# EAGLE board panel-ccu-pcu-out (EAGLE 9.3.0)
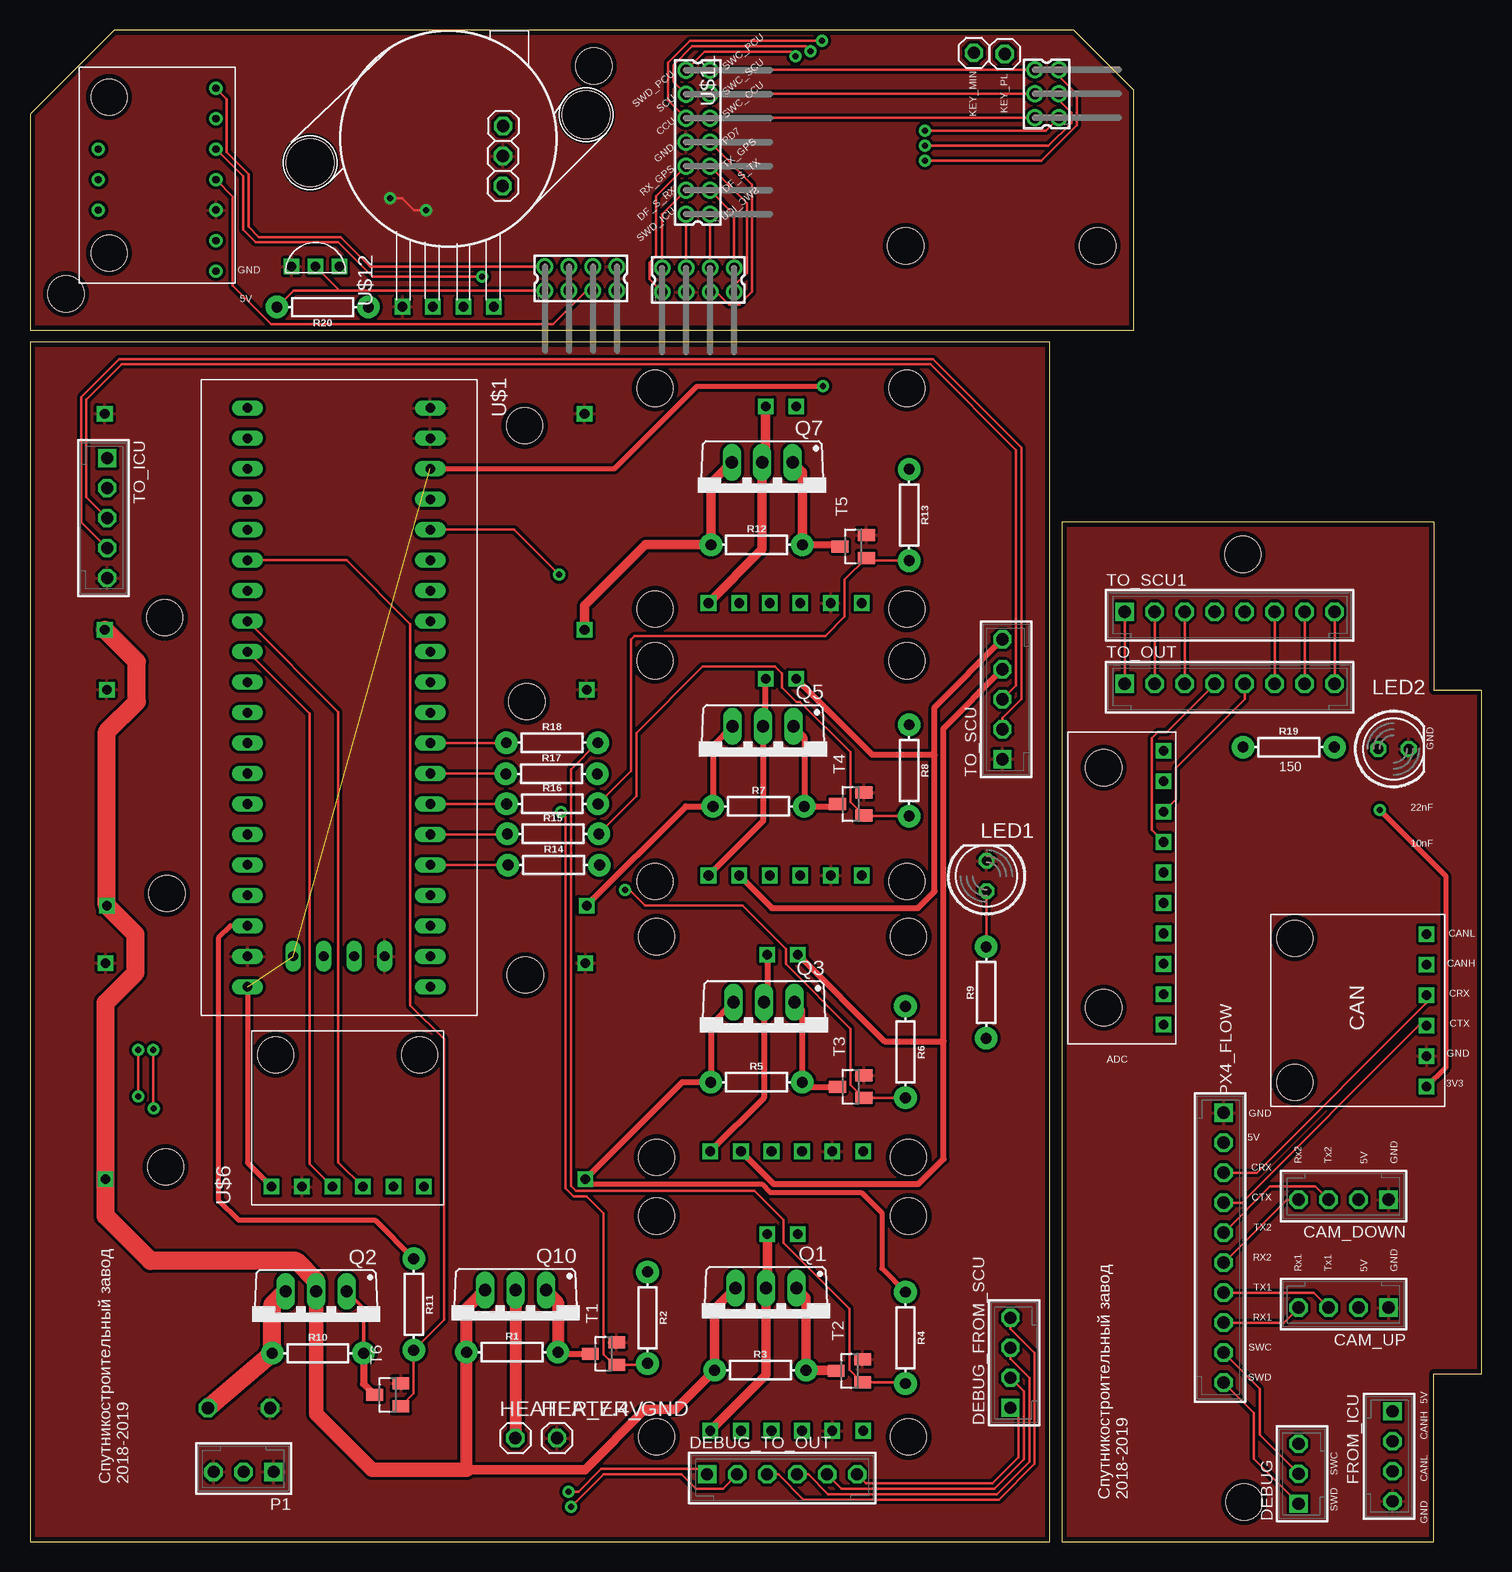
[diagram p0: board, top side]
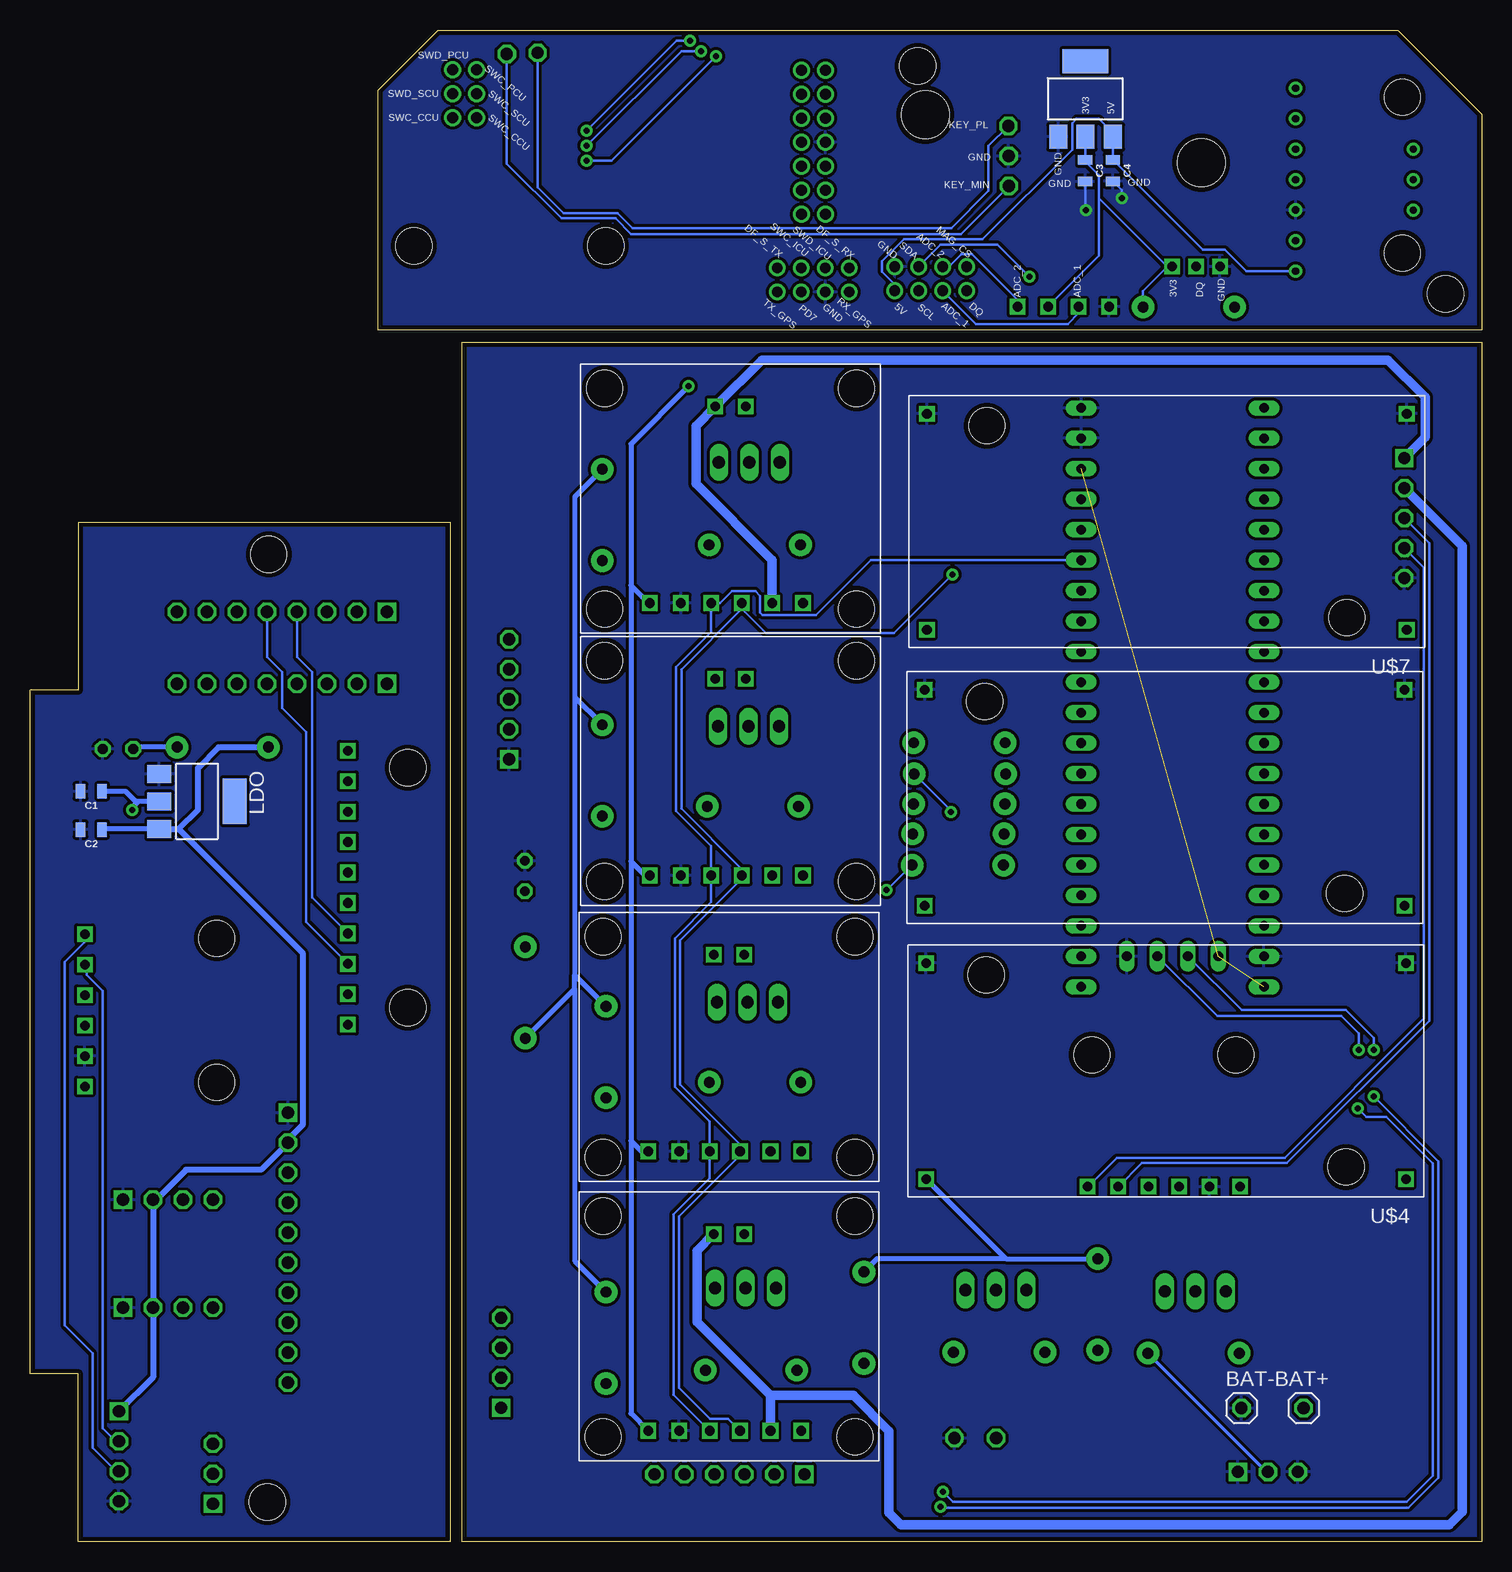
[diagram p1: board, bottom side, seen from below]

Size 121 x 126 mm. Coordinates in mm from the lower left corner, seen from the top.
Outline: 121,14 121,71 117,71 117,85 86,85 86,0 117,0 117,14 121,14
Outline: 0,0 85,0 85,100 0,100 0,0
Outline: 0,101 92,101 92,121 87,126 7,126 0,119 0,101
Copper layers (1*16): Top 0.035mm / dielectric 1mm / Bottom 0.035mm
Design rules "rezonit": minimum track width 0.2mm, minimum drill 0.5mm, track to track 0.25mm, track to pad 0.25mm, pad to pad 0.25mm, via to via 0.25mm, smd to smd 0.2mm, copper to edge 0.4mm, drill to drill 0.4mm, minimum pad ring 0.25mm, minimum via ring 0.25mm, stop-mask expansion 4mil, vias tented up to drill 0.6mm, thermal gap 10mil
Holes 3 mm at 101.2,3.3 101.1,82.3 3,104 47,123 89,108 73,108

## Footprints (pad centres in the part's own frame; a part is rotated, then mirrored left to right if it is on the bottom)
1X01 = drill 1.016 octagon: 1 0,0
0805 = smd 0.8 x 1.2: 1 -0.9,0; 2 0.9,0
B4B-EH-A = drill 1.016 square: 1 -3.75,0 | drill 1.016 octagon: 2 -1.25,0; 3 1.25,0; 4 3.75,0
CAN = drill 0.8 square: 3V3 -5.75,6.35; CANH -5.75,-3.81; CANL -5.75,-6.35; CRX -5.75,-1.27; CTX -5.75,1.27; GND -5.75,3.81 | hole 3: 5.25,6; 5.25,-6
B3B-EH-A = drill 1.016 square: 1 -2.5,0 | drill 1.016 octagon: 2 0,0; 3 2.5,0
B6B-EH-A = drill 1.016 square: 1 -6.25,0 | drill 1.016 octagon: 2 -3.75,0; 3 -1.25,0; 4 1.25,0; 5 3.75,0; 6 6.25,0
SOT223 = smd 1.499 x 2.007: 1 -2.261,-3.15; 2 0.025,-3.15; 3 2.311,-3.15 | smd 3.81 x 2.007: 4 0,3.15
LED5MM = drill 0.813 octagon: A -1.27,0; K 1.27,0
B10B-EH-A = drill 1.016 square: 1 -11.25,0 | drill 1.016 octagon: 2 -8.75,0; 3 -6.25,0; 4 -3.75,0; 5 -1.25,0; 6 1.25,0; 7 3.75,0; 8 6.25,0; 9 8.75,0; 10 11.25,0
TO220BV = drill 1.016 long: D 0,-2.54; G -2.54,-2.54; S 2.54,-2.54
AXIAL-0.3 = drill 0.9 pad 1.88: P$1 -3.81,0; P$2 3.81,0
SOT23 = smd 1 x 1.4: 1 -0.95,-1.1; 2 0.95,-1.1; 3 0,1.1
B5B-EH-A = drill 1.016 square: 1 -5,0 | drill 1.016 octagon: 2 -2.5,0; 3 0,0; 4 2.5,0; 5 5,0
B8B-EH-A = drill 1.016 square: 1 -8.75,0 | drill 1.016 octagon: 2 -6.25,0; 3 -3.75,0; 4 -1.25,0; 5 1.25,0; 6 3.75,0; 7 6.25,0; 8 8.75,0
BLUEPIL = drill 0.8 long: 3V3_0 -19.05,7.62; 3V3_1 24.13,-7.62; 3V3_2 21.59,-3.81; 5V 19.05,-7.62; A0 13.97,7.62; A1 11.43,7.62; A2 8.89,7.62; A3 6.35,7.62; A4 3.81,7.62; A5 1.27,7.62; A6 -1.27,7.62; A7 -3.81,7.62; A8 -13.97,-7.62; A9 -11.43,-7.62; A10 -8.89,-7.62; A11 -6.35,-7.62; A12 -3.81,-7.62; A15 -1.27,-7.62; B0 -6.35,7.62; B1 -8.89,7.62; B3 1.27,-7.62; B4 3.81,-7.62; B5 6.35,-7.62; B6 8.89,-7.62; B7 11.43,-7.62; B8 13.97,-7.62; B9 16.51,-7.62; B10 -11.43,7.62; B11 -13.97,7.62; B12 -24.13,-7.62; B13 -21.59,-7.62; B14 -19.05,-7.62; B15 -16.51,-7.62; C13 21.59,7.62; C14 19.05,7.62; C15 16.51,7.62; GND0 -24.13,7.62; GND1 -21.59,7.62; GND2 21.59,-7.62; GND3 21.59,3.81; RESET -16.51,7.62; SWCLK 21.59,1.27; SWDIO 21.59,-1.27; VB 24.13,7.62
INA = drill 0.8 square: GND -4.15,-8.7; SCL -1.61,-8.7; SDA 0.93,-8.7; VCC -6.72,-8.7; VIN+_0 6.04,-8.7; VIN+_1 1.27,7.7; VIN-_0 3.47,-8.7; VIN-_1 -1.27,7.7 | hole 3: -10.5,9.2; 10.5,9.2; 10.5,-9.2; -10.5,-9.2
DCDC = drill 0.8 square: IN+ -20,9; IN- -20,-9; OUT+ 20,9; OUT- 20,-9 | hole 3: -15,8; 15,-8
ADS = drill 0.8 square: A0 -3.5,-3.81; A1 -3.5,-6.35; A2 -3.5,-8.89; A3 -3.5,-11.43; ADDR -3.5,1.27; ALERT -3.5,-1.27; G -3.5,8.89; SCL -3.5,6.35; SDA -3.5,3.81; V -3.5,11.43 | hole 3: 1.5,10; 1.5,-10
MPX = drill 0.8 square: GND 14,-3.81; V1 14,-1.27; V2 14,3.81; VCC 14,1.27 | hole 4: -2,11.5; 2,-11.5
TEMP = drill 0.8 square: DQ -0.5,0; GND -0.5,-2; VDD -0.5,2
LSM303C = drill 0.6: 3V3 -4.9,5.46; 5V -4.9,8; CSA -4.9,-4.7; CSM -4.9,-7.24; DRYM 4.9,0.38; GND -4.9,2.9; INTA 4.9,2.92; INTM 4.9,-2.16; SCL -4.9,0.38; SDA -4.9,-2.16 | hole 3: 4,6.5; 4,-6.5
332-14 = drill 0.9 pad 1.27: 1 -6,-1; 2 -6,1; 3 -4,-1; 4 -4,1; 5 -2,-1; 6 -2,1; 7 0,-1; 8 0,1; 9 2,-1; 10 2,1; 11 4,-1; 12 4,1; 13 6,-1; 14 6,1
332-08 = drill 0.9 pad 1.27: 1 -3,-1; 2 -3,1; 3 -1,-1; 4 -1,1; 5 1,-1; 6 1,1; 7 3,-1; 8 3,1
332-06 = drill 0.9 pad 1.27: 1 -2,-1; 2 -2,1; 3 0,-1; 4 0,1; 5 2,-1; 6 2,1

## Placement (x,y rotation side)
BAT+  [1X01]  14.83,11.12 0 bottom
BAT-  [1X01]  20.01,11.12 0 bottom
C1  22uF  [0805]  115.89,62.54 180 bottom
C2  10uF  [0805]  115.89,59.35 180 bottom
C3  22uF  [0805]  33.03,114.27 270 bottom
C4  10uF  [0805]  30.73,114.28 270 bottom
CAM_DOWN  B4B-EH-A  [B4B-EH-A]  109.5,28.5 180 top
CAM_UP  B4B-EH-A  [B4B-EH-A]  109.5,19.5 180 top
CAN  CAN  [CAN]  110.68,44.28 180 top
DEBUG  B3B-EH-A  [B3B-EH-A]  105.75,5.65 90 top
DEBUG_FROM_SCU  B4B-EH-A  [B4B-EH-A]  81.73,14.9 90 top
DEBUG_TO_OUT  B6B-EH-A  [B6B-EH-A]  62.7,5.6 0 top
FROM_ICU  B4B-EH-A  [B4B-EH-A]  113.59,7.1 270 top
HEATER_7.4V  [1X01]  40.46,8.62 0 top
HEATER_GND  [1X01]  43.93,8.62 0 top
IC1  REG1117  [SOT223]  33.03,120.25 0 bottom
JP1  [1X01]  81.26,124 0 top
JP2  [1X01]  78.68,124.1 0 top
JP6  [1X01]  39.4,113 0 top
JP7  [1X01]  39.42,115.5 0 top
JP8  [1X01]  39.44,118 0 top
LDO  REG1117  [SOT223]  107.07,61.7 270 bottom
LED1  [LED5MM]  79.74,55.47 90 top
LED2  [LED5MM]  113.66,66.07 0 top
P1  B3B-EH-A  [B3B-EH-A]  17.8,5.8 180 top
PX4_FLOW  B10B-EH-A  [B10B-EH-A]  99.5,24.5 270 top
Q1  IRF9530  [TO220BV]  61.35,18.59 180 top
Q2  IRF9530  [TO220BV]  23.85,18.32 180 top
Q3  IRF9530  [TO220BV]  61.18,42.42 180 top
Q5  IRF9530  [TO220BV]  61.11,65.42 180 top
Q7  IRF9530  [TO220BV]  61.04,87.42 180 top
Q10  IRF9530  [TO220BV]  40.47,18.42 180 top
R1  10k  [AXIAL-0.3]  40.2,15.78 0 top
R2  10k  [AXIAL-0.3]  51.48,18.66 270 top
R3  10k  [AXIAL-0.3]  60.88,14.28 0 top
R4  10k  [AXIAL-0.3]  72.98,16.98 270 top
R5  10k  [AXIAL-0.3]  60.56,38.28 0 top
R6  10k  [AXIAL-0.3]  72.98,40.8 270 top
R7  10k  [AXIAL-0.3]  60.74,61.28 0 top
R8  10k  [AXIAL-0.3]  73.29,64.28 270 top
R9  150  [AXIAL-0.3]  79.71,45.76 90 top
R10  10k  [AXIAL-0.3]  24,15.69 0 top
R11  10k  [AXIAL-0.3]  31.99,19.76 270 top
R12  10k  [AXIAL-0.3]  60.58,83.09 0 top
R13  10k  [AXIAL-0.3]  73.29,85.58 270 top
R14  10  [AXIAL-0.3]  43.66,56.39 0 top
R15  10  [AXIAL-0.3]  43.6,58.99 0 top
R16  10  [AXIAL-0.3]  43.54,61.49 0 top
R17  10  [AXIAL-0.3]  43.48,63.99 0 top
R18  10  [AXIAL-0.3]  43.52,66.59 0 top
R19  150  [AXIAL-0.3]  104.93,66.22 0 top
R20  4k7  [AXIAL-0.3]  24.4,102.9 180 top
T1  2N7002E  [SOT23]  47.81,15.66 90 top
T2  2N7002E  [SOT23]  68.31,14.23 90 top
T3  2N7002E  [SOT23]  68.42,37.91 90 top
T4  2N7002E  [SOT23]  68.42,61.48 90 top
T5  2N7002E  [SOT23]  68.62,82.95 90 top
T6  2N7002E  [SOT23]  29.82,12.22 90 top
TO_ICU  B5B-EH-A  [B5B-EH-A]  6.43,85.32 270 top
TO_OUT  B8B-EH-A  [B8B-EH-A]  100,71.5 0 top
TO_SCU  B5B-EH-A  [B5B-EH-A]  81.07,70.21 90 top
TO_SCU1  B8B-EH-A  [B8B-EH-A]  100,77.5 0 top
U$1  BLUEPILLTHEONLYONE  [BLUEPIL]  25.75,70.37 270 top
U$2  INA  [INA]  62.6,86.93 0 bottom
U$3  INA  [INA]  62.74,17.93 0 bottom
U$4  DCDC  [DCDC]  26.3,39.22 180 bottom
U$5  DCDC  [DCDC]  26.41,62.01 180 bottom
U$6  CAN  [CAN]  26.48,35.32 90 top
U$7  DCDC  [DCDC]  26.23,85.01 180 bottom
U$8  INA  [INA]  62.6,64.22 0 bottom
U$9  INA  [INA]  62.74,41.22 0 bottom
U$10  ADS  [ADS]  91,54.5 180 top
U$11  MPX  [MPX]  34.86,116.94 270 top
U$12  TEMP  [TEMP]  23.8,105.78 270 top
U$13  LSM303C  [LSM303C]  10.6,113.9 180 top
X1  332-14  [332-14]  55.68,116.64 90 top
X2  332-08  [332-08]  45.92,105.28 0 top
X3  332-08  [332-08]  55.7,105.16 0 top
X4  332-06  [332-06]  84.76,120.68 90 top

## Library data of the parts
BAT+ BAT- HEATER_7.4V HEATER_GND JP1 JP2 JP6-JP8 = pinhead
C1 C3 = SparkFun-Capacitors; PROD_ID: CAP-08402
C2 C4 = SparkFun-Capacitors; PROD_ID: CAP-14260
CAM_DOWN CAM_UP DEBUG DEBUG_FROM_SCU DEBUG_TO_OUT FROM_ICU P1 PX4_FLOW TO_ICU TO_OUT TO_SCU TO_SCU1 = con-jst-eh
CAN U$1-U$13 = bluepill
IC1 LDO = burr-brown; MPN: REG1117; OC_FARNELL: 1097566; OC_NEWARK: 14P6981
LED1 LED2 = led
Q1-Q3 Q5 Q7 Q10 = transistor-power
R1-R20 = SparkFun-Resistors
T1-T6 = nxp_60
X1-X4 = con-garry

## Nets
3V1: C1.1 CAN.3V3 LDO.2
3V2: C3.1 IC1.2 R20.P$1 U$11.VCC U$12.VDD
3V3: U$1.3V3_0 U$1.3V3_1 U$1.3V3_2 U$2.VCC U$3.VCC U$6.3V3 U$8.VCC U$9.VCC
5V: C4.1 IC1.3 U$13.5V X2.7
5V_CCU: TO_SCU.4 U$9.VIN-_0 U$9.VIN-_1
5V_CCU1: C2.1 CAM_DOWN.2 CAM_UP.2 FROM_ICU.1 LDO.3 PX4_FLOW.2 R19.P$1
5V_CONTINUOUS: Q3.S R2.P$1 R4.P$1 R5.P$1 R6.P$1 R8.P$1 R9.P$1 R11.P$1 R13.P$1 U$1.5V U$4.OUT+
5V_ICU: TO_ICU.1 U$2.VIN-_0 U$2.VIN-_1
5V_SCU: TO_SCU.5 U$8.VIN-_0 U$8.VIN-_1
7.4V: TO_ICU.2 U$3.VIN-_0 U$3.VIN-_1
ADC_1: U$11.V1 X2.3
ADC_2: U$11.V2 X2.4
CANH: TO_ICU.3 TO_SCU.3 U$6.CANH
CANL: TO_ICU.4 TO_SCU.2 U$6.CANL
CRX: CAN.CRX PX4_FLOW.3
CTX: CAN.CTX PX4_FLOW.4
DF_S_RX: X1.4 X3.2
DF_S_TX: X1.3 X3.8
DQ: R20.P$2 U$12.DQ X2.1
GND: BAT-.1 HEATER_GND.1 LED1.K P1.1 P1.3 T1.2 T2.2 T3.2 T4.2 T5.2 T6.2 TO_ICU.5 TO_SCU.1 U$1.GND0 U$1.GND1 U$1.GND2 U$1.GND3 U$2.GND U$3.GND U$4.IN- U$4.OUT- U$5.IN- U$5.OUT- U$6.GND U$7.IN- U$7.OUT- U$8.GND U$9.GND
GND1: C1.2 C2.2 CAM_DOWN.1 CAM_UP.1 CAN.GND FROM_ICU.4 LDO.1 LED2.K PX4_FLOW.1
GND2: C3.2 C4.2 IC1.1 JP7.1 U$11.GND U$12.GND U$13.GND X1.8 X2.8 X3.3
HEATER_7.4V: HEATER_7.4V.1 Q10.D
KEY_1: BAT+.1 Q2.S R10.P$1
KEY_2: Q1.S Q2.D Q10.S R1.P$1 R3.P$1 U$4.IN+ U$5.IN+ U$7.IN+
KEY_MINUS: JP1.1 JP6.1
KEY_PLUS: JP2.1 JP8.1
KILLSWITCH: R11.P$2 T6.1 U$1.A9
MAG_CS: U$13.CSM X2.2
N$1: Q1.G R3.P$2 T2.3
N$2: U$1.A11 U$6.CRX
N$3: Q5.G R7.P$2 T4.3
N$4: Q7.G R12.P$2 T5.3
N$5: Q5.S R7.P$1 U$5.OUT+
N$6: Q3.G R5.P$2 T3.3
N$7: Q7.S R12.P$1 U$7.OUT+
N$8: Q1.D U$3.VIN+_0 U$3.VIN+_1
N$9: Q3.D U$9.VIN+_0 U$9.VIN+_1
N$10: Q5.D U$8.VIN+_0 U$8.VIN+_1
N$11: Q7.D U$2.VIN+_0 U$2.VIN+_1
N$12: U$1.B11 U$2.SDA U$3.SDA U$8.SDA U$9.SDA
N$13: U$1.B10 U$2.SCL U$3.SCL U$8.SCL U$9.SCL
N$14: U$1.A12 U$6.CTX
N$15: LED1.A R9.P$2
N$16: Q10.G R1.P$2 T1.3
N$17: R14.P$1 U$1.A0
N$18: R15.P$1 U$1.A1
N$19: R16.P$1 U$1.A2
N$20: R17.P$1 U$1.A3
N$21: R18.P$1 U$1.A4
N$22: P1.2 Q2.G R10.P$2 T6.3
N$23: CAN.CANL FROM_ICU.3
N$24: CAN.CANH FROM_ICU.2
N$25: LED2.A R19.P$2
N$26: TO_OUT.8 TO_SCU1.8
N$27: TO_OUT.7 TO_SCU1.7
N$28: TO_OUT.6 TO_SCU1.6
N$29: TO_OUT.3 TO_SCU1.3
N$30: TO_OUT.2 TO_SCU1.2
N$31: TO_OUT.1 TO_SCU1.1
N$32: TO_SCU1.5 U$10.SCL
N$33: TO_SCU1.4 U$10.SDA
N$34: TO_OUT.5 U$10.A1
N$35: TO_OUT.4 U$10.A0
PCTRL_AMP: R4.P$2 R18.P$2 T2.1
PCTRL_CCU: R6.P$2 R14.P$2 T3.1
PCTRL_HEATER: R2.P$2 R17.P$2 T1.1
PCTRL_ICU: R13.P$2 R16.P$2 T5.1
PCTRL_SCU: R8.P$2 R15.P$2 T4.1
PD7: X1.7 X3.5
RX1: CAM_UP.4 PX4_FLOW.8
RX2: CAM_DOWN.4 PX4_FLOW.6
RX_GPS: X1.6 X3.1
SCL: U$13.SCL X2.5
SDA: U$13.SDA X2.6
SWC: DEBUG.2 PX4_FLOW.9
SWC_ICU: X1.1 X3.6
SWCLK_0: DEBUG_TO_OUT.1 U$1.SWCLK
SWCLK_2: DEBUG_FROM_SCU.3 DEBUG_TO_OUT.4
SWCLK_3: DEBUG_FROM_SCU.1 DEBUG_TO_OUT.6
SWCLK_CCU: X1.9 X4.2
SWCLK_PCU: X1.13 X4.6
SWCLK_SCU: X1.11 X4.4
SWD: DEBUG.1 PX4_FLOW.10
SWD_ICU: X1.2 X3.4
SWDIO_0: DEBUG_TO_OUT.2 U$1.SWDIO
SWDIO_2: DEBUG_FROM_SCU.4 DEBUG_TO_OUT.3
SWDIO_3: DEBUG_FROM_SCU.2 DEBUG_TO_OUT.5
SWDIO_CCU: X1.10 X4.1
SWDIO_PCU: X1.14 X4.5
SWDIO_SCU: X1.12 X4.3
TX1: CAM_UP.3 PX4_FLOW.7
TX2: CAM_DOWN.3 PX4_FLOW.5
TX_GPS: X1.5 X3.7

## Tracks (layer width: path | path; a pad name or v marks a point on that pad's centre or on a via)
3V1  (via drill 0.5)
  Top 0.4: v112.5,61 118,55.5 118,39.5 CAN.3V3
  Bottom 0.4: LDO.2 112,61.67 | 112,61.67 112.17,61.67 113.04,62.54 C1.1 | 112,61.67 112.5,61.17 v112.5,61
3V2
  Bottom 0.2: IC1.2 33.01,115.19 C3.1 33.03,115.03 31.9,113.9 31.9,112 | 31.9,112 26.18,106.28 | 26.18,106.28 U$12.VDD | U$11.VCC 31.9,107.17 31.9,112 | R20.P$1 28.21,104.25 26.18,106.28
3V3  (via drill 0.5)  (2 unrouted)
  Top 0.4: U$1.3V3_0 48.72,89.42 55.6,96.3 v66.1,96.3 | U$1.3V3_1 18.13,31.57 U$6.3V3
  Bottom 0.4: v66.1,96.3 70.9,91.5 70.9,79.7 | U$3.VCC 70.9,10.67 70.9,33.4 | 70.9,79.7 70.9,56.7 | 70.9,56.7 70.9,33.4 | U$9.VCC 70.02,32.52 70.9,33.4 | U$8.VCC 69.72,55.52 70.9,56.7 | U$2.VCC 69.43,78.23 70.9,79.7
5V
  Bottom 0.2: X2.7 48.92,104.8 49.97,105.84 49.97,106.72 48.13,108.55 41.59,108.55 34.1,116.04 34.1,118.25 33.75,118.6 31.9,118.6 30.72,117.42 IC1.3 30.72,115.19 C4.1 23.25,107.7 21.4,107.7 19.6,105.9 U$13.5V
5V_CCU
  Top 0.5: U$9.VIN-_0 61.99,29.8 74.06,29.8 76.15,31.89 76.15,41.7 | TO_SCU.4 76.15,67.79 76.15,41.7 | U$9.VIN-_1 71.23,41.7 76.15,41.7
5V_CCU1
  Bottom 0.4: LDO.3 114.95,59.39 C2.1
  Bottom 0.5: 108.61,59.39 98.24,49.02 98.24,34.78 99.5,33.52 PX4_FLOW.2 101.75,31 108,31 110.5,28.5 CAM_DOWN.2 CAM_UP.2 110.75,13.69 FROM_ICU.1 | LDO.3 108.61,59.39 | 108.61,59.39 107,61 107,64.5 105.28,66.22 R19.P$1
5V_CONTINUOUS
  Top 0.4: U$1.5V 16.72,51.32 15.7,50.3 15.7,28.5 17.4,26.8 28.76,26.8 R11.P$1 | U$4.OUT+ 46.72,29.8 61,29.8 61.7,29.1 69.3,29.1 71,27.4 71,22.77 R4.P$1
  Top 0.5: Q3.S 56.75,43.07 R5.P$1 54.36,38.28 U$4.OUT+
  Bottom 0.4: U$4.OUT+ 39.65,23.57 | 39.65,23.57 R11.P$1 | 39.65,23.57 50.38,23.57 R2.P$1 | R13.P$1 75.6,87.08 75.6,70.4 | R4.P$1 75.6,23.41 75.6,46.06 | 75.6,70.4 75.6,47.23 | R6.P$1 75.6,47.23 | R9.P$1 75.6,46.06 | 75.6,46.06 75.6,47.23 | R8.P$1 75.6,70.4
5V_ICU
  Bottom 0.8: U$2.VIN-_0 59.13,81.83 65.5,88.2 65.5,93 U$2.VIN-_1 60,98.5 7.8,98.5 4.7,95.4 4.7,92.05 TO_ICU.1
5V_SCU
  Top 0.5: U$8.VIN-_0 61.85,52.8 74,52.8 75.4,54.2 75.4,65.6 | TO_SCU.5 75.4,69.54 75.4,65.6 | U$8.VIN-_1 70.19,65.6 75.4,65.6
7.4V
  Bottom 0.8: U$3.VIN-_1 65.4,24.24 65.4,18.3 59.27,12.17 | 59.27,12.17 U$3.VIN-_0 | 59.27,12.17 52.37,12.17 49.4,9.2 49.4,2.4 48.4,1.4 2.7,1.4 1.6,2.5 1.6,82.99 TO_ICU.2
ADC_1
  Bottom 0.2: U$11.V1 33.59,102.41 34.5,101.5 42.14,101.5 X2.3
ADC_2
  Bottom 0.2: X2.4 44.41,106.28 43.35,107.33 42.48,107.33 38.67,103.52 U$11.V2
CANH
  Top 0.2: TO_ICU.3 4.7,87.05 4.7,95.2 7.63,98.13 75.07,98.13 82.2,91 82.2,71.34 TO_SCU.3
  Bottom 0.2: TO_ICU.3 4.35,83.24 4.35,43.41 16.21,31.55 28.31,31.55 U$6.CANH
CANL
  Top 0.2: TO_ICU.4 4.25,85 4.25,95.39 7.44,98.58 75.26,98.58 82.65,91.19 82.65,70.22 81.07,68.64 TO_SCU.2
  Bottom 0.2: TO_ICU.4 4.8,81.19 4.8,43.6 16.4,32 30.4,32 U$6.CANL
CRX
  Top 0.2: PX4_FLOW.3 102.25,30.75 116.43,44.93 CAN.CRX
CTX
  Top 0.2: PX4_FLOW.4 101,28.25 115.76,43.01 CAN.CTX
DF_S_RX
  Top 0.2: X3.2 52.7,110.66 X1.4
DF_S_TX
  Top 0.2: X3.8 58.7,110.62 X1.3
DQ
  Top 0.2: U$12.DQ 25.8,104.28 | 25.8,104.28 X2.1 | 25.8,104.28 21.97,104.28 R20.P$2
GND
  pour Top: 0,100 85,100 85,0 0,0
  pour Bottom: 0,100 85,100 85,0 0,0
GND1
  pour Top: 86,0 117,0 117,14 121,14 121,71 117,71 117,85 86,85
  pour Bottom: 86,0 117,0 117,14 121,14 121,71 117,71 117,85 86,85
GND2  (via drill 0.5)
  Top 0.2: v30,112 31,112 32,111 v33,111
  Bottom 0.2: v30,112 30,112.65 C4.2 | v33,111 33.03,111.03 C3.2
  pour Top: 0,101 0,119 7,126 87,126 92,121 92,101
  pour Bottom: 0,101 0,119 7,126 87,126 92,121 92,101
HEATER_7.4V
  Top 1: Q10.D HEATER_7.4V.1
KEY_1
  Top 1.5: Q2.S 20.19,19.74 R10.P$1 BAT+.1
KEY_2
  Top 0.8: Q1.S 57.07,19.39 R3.P$1 53.82,11.03 51.29,11.03 46.26,6 36.4,6
  Top 1: Q10.S 36.39,19.42 R1.P$1 36.4,6
  Top 1.2: Q2.D 23.85,10.65 28.5,6 36.4,6
  Top 1.5: Q2.D 23.85,21.75 22.22,23.38 10.06,23.38 6.3,27.14 U$4.IN+ 6.3,44.9 8.8,47.4 8.8,50.62 U$5.IN+ 6.41,67.51 8.9,70 8.9,73.34 U$7.IN+
KEY_MINUS
  Bottom 0.2: JP6.1 43.4,109 70.9,109 72.2,110.3 76.7,110.3 81.26,114.86 JP1.1
KEY_PLUS
  Bottom 0.2: JP8.1 41.1,116.34 41.1,112.6 44.2,109.5 70.76,109.5 72.01,110.75 76.51,110.75 78.68,112.92 JP2.1
KILLSWITCH
  Top 0.2: T6.1 31.99,12.34 R11.P$2 34.5,18.46 34.5,41.9 31.7,44.7 31.7,76.5 26.4,81.8 U$1.A9
MAG_CS
  Top 0.2: X2.2 28.36,106.28 25.89,108.75 19.06,108.75 18.21,109.6 18.21,113.99 16.4,115.8 16.4,120.24 U$13.CSM
N$1
  Top 0.8: Q1.G 64.69,20.33 R3.P$2 67.16,14.28 T2.3
N$2
  Top 0.2: U$1.A11 25.7,69.15 25.7,31.62 U$6.CRX
N$3
  Top 0.5: Q5.G 64.55,67.06 R7.P$2 67.12,61.28 T4.3
N$4
  Top 0.6: R12.P$2 67.38,83.09 T5.3
  Top 0.8: Q7.G 64.39,89.15 R12.P$2
N$5
  Top 0.5: Q5.S 56.93,66.32 R7.P$1 54.68,61.28 U$5.OUT+
N$6
  Top 0.5: Q3.G 64.37,44.31 R5.P$2 64.74,37.91 T3.3
N$7
  Top 0.8: Q7.S 56.77,88.23 R12.P$1 51.31,83.09 46.23,78.01 U$7.OUT+
N$8
  Top 0.8: U$3.VIN+_1 61.47,21.25 Q1.D 61.35,13.88 U$3.VIN+_0
N$9
  Top 0.5: U$9.VIN+_1 61.47,45.25 Q3.D 61.18,37 U$9.VIN+_0
N$10
  Top 0.5: U$8.VIN+_1 61.33,68.18 Q5.D 61.11,60.07 U$8.VIN+_0
N$11
  Top 0.8: U$2.VIN+_1 61.33,90.25 Q7.D 61.04,82.71 U$2.VIN+_0
N$12  (via drill 0.5)
  Top 0.2: v44.1,80.6 40.36,84.34 U$1.B11
  Bottom 0.2: U$3.SDA 62.81,10.23 64.3,10.23 66.9,12.83 66.9,27.1 61.81,32.19 U$9.SDA 61.81,33.09 61.8,33.1 66.8,38.1 66.8,50.1 61.67,55.23 U$8.SDA 61.67,56.07 66.7,61.1 66.7,72.7 61.67,77.73 U$2.SDA 61.67,77.77 59.63,75.73 48.97,75.73 v44.1,80.6
N$13
  Bottom 0.2: U$3.SCL 67.35,12.23 67.35,27.29 64.35,30.29 U$9.SCL 64.35,35.01 67.25,37.91 67.25,50.29 64.21,53.33 U$8.SCL 64.21,57.97 67.15,60.91 67.15,72.89 64.21,75.83 U$2.SCL 63.47,78.23 62.47,79.23 60.53,79.23 60.13,78.83 60.13,77.44 59.92,77.23 55.47,77.23 50.9,81.8 U$1.B10
N$14
  Top 0.2: U$1.A12 23.3,69.01 23.3,31.48 U$6.CTX
N$15
  Top 0.2: R9.P$2 79.71,54.17 LED1.A
N$16
  Top 0.5: R1.P$2 44.13,15.66 T1.3
  Top 1: Q10.G 44.01,19.96 R1.P$2
N$17
  Top 0.2: U$1.A0 R14.P$1
N$18
  Top 0.2: U$1.A1 39.74,58.94 R15.P$1
N$19
  Top 0.2: U$1.A2 R16.P$1
N$20
  Top 0.2: U$1.A3 39.64,64.02 R17.P$1
N$21
  Top 0.2: U$1.A4 39.68,66.56 R18.P$1
N$22
  Top 0.3: Q2.G 27.81,19.44 R10.P$2
  Top 0.6: R10.P$2 27.81,13.13 T6.3
  Bottom 0.3: R10.P$2 17.92,5.8 P1.2
N$23
  Bottom 0.2: CAN.CANL 116.5,50.62 116.5,49.95 118.12,48.33 118.12,18.02 115.78,15.68 115.78,7.83 113.8,5.85 FROM_ICU.3
N$24
  Bottom 0.2: CAN.CANH 116.28,47.92 116.28,47.25 114.92,45.9 114.92,9.45 113.8,8.32 FROM_ICU.2
N$25
  Bottom 0.4: R19.P$2 112.24,66.22 LED2.A
N$26
  Top 0.2: TO_OUT.8 TO_SCU1.8
N$27
  Top 0.2: TO_OUT.7 TO_SCU1.7
N$28
  Top 0.2: TO_OUT.6 TO_SCU1.6
N$29
  Top 0.2: TO_OUT.3 TO_SCU1.3
N$30
  Top 0.2: TO_OUT.2 TO_SCU1.2
N$31
  Top 0.2: TO_OUT.1 TO_SCU1.1
N$32
  Bottom 0.2: TO_SCU1.5 101.25,73.75 100,72.5 100,69.5 98,67.5 98,51.65 U$10.SCL
N$33
  Bottom 0.2: TO_SCU1.4 98.75,73.75 97.5,72.5 97.5,53.69 U$10.SDA
N$34
  Top 0.2: TO_OUT.5 101.25,70.25 95.5,64.5 95.5,61.85 U$10.A1
N$35
  Top 0.2: TO_OUT.4 94.75,67.5 94,67.5 93.5,67 93.5,59.31 U$10.A0
PCTRL_AMP
  Top 0.2: R4.P$2 72.87,13.28 T2.1 69.32,13.28 68.3,14.3 68.3,19.4 62.8,24.9 62.8,26.8 60.38,29.22 45.51,29.22 45.1,29.62 45.1,64.36 R18.P$2
PCTRL_CCU  (via drill 0.5)
  Top 0.2: R6.P$2 72.95,36.96 T3.1 68.4,38.08 68.4,42.73 63.01,48.12 63.01,49.39 59.38,53.02 51.27,53.02 49.99,54.3 v49.6,54.3
  Bottom 0.2: R14.P$2 49.56,54.3 v49.6,54.3
PCTRL_HEATER  (via drill 0.5)
  Top 0.2: R2.P$2 51.34,14.71 T1.1 48.69,14.71 47.8,15.6 47.8,27.37 46.4,28.77 45.32,28.77 44.65,29.44 44.65,60.4 v44.25,60.8
  Bottom 0.2: R17.P$2 44.25,60.95 v44.25,60.8
PCTRL_ICU
  Top 0.2: R13.P$2 69.95,81.77 T5.1 67.9,80.18 67.9,77.1 66.3,75.5 50.4,75.5 50.1,75.2 50.1,64.24 R16.P$2
PCTRL_SCU
  Top 0.2: R8.P$2 69.58,60.47 T4.1 68.4,61.65 68.4,65.8 64.2,70 63.9,70 62.7,71.2 62.7,72.34 62.12,72.92 56.07,72.92 50.55,67.4 50.55,62.13 R15.P$2
PD7
  Top 0.2: X3.5 57.22,104.16 58.27,103.11 59.13,103.11 60.2,104.17 60.2,113.12 X1.7
RX1
  Top 0.2: CAM_UP.4 104.5,18.25 PX4_FLOW.8
RX2
  Top 0.2: PX4_FLOW.6 104.75,28.5 CAM_DOWN.4
RX_GPS
  Top 0.2: X3.1 51.65,105.21 51.65,106.59 52.2,107.14 52.2,112.16 X1.6
SCL
  Top 0.2: X2.5 46.41,104.28 43.62,101.5 20.1,101.5 16.9,104.7 16.9,112.12 U$13.SCL
SDA  (via drill 0.5)
  Top 0.2: v37.7,105.43 28.57,105.43 25.7,108.3 18.8,108.3 17.76,109.34 17.76,113.8 U$13.SDA
  Bottom 0.2: X2.6 45.1,108.1 40.37,108.1 v37.7,105.43
SWC
  Top 0.2: DEBUG.2 102.5,8.9 102.5,12.75 PX4_FLOW.9
SWC_ICU
  Top 0.2: X1.1 56.68,106.18 X3.6
SWCLK_0  (via drill 0.5)
  Top 0.2: v10.25,41 10.25,36.15 v10.3,36.1 | v44.9,4.15 45.71,4.15 47.61,6.05 56,6.05 DEBUG_TO_OUT.1
  Bottom 0.2: U$1.SWCLK 22.04,43.8 11.7,43.8 10.25,42.35 v10.25,41 | v10.3,36.1 9.6,35.4 7.94,35.4 4.05,31.51 4.05,5.49 6.22,3.32 44.07,3.32 v44.9,4.15
SWCLK_2
  Top 0.2: DEBUG_TO_OUT.4 64.88,5.6 66.53,3.95 80.59,3.95 83.29,6.66 83.29,13.66 81.73,15.22 DEBUG_FROM_SCU.3
SWCLK_3
  Top 0.2: DEBUG_TO_OUT.6 69.7,4.85 80.21,4.85 82.39,7.03 82.39,10.49 DEBUG_FROM_SCU.1
SWCLK_CCU
  Top 0.2: X4.2 56.72,118.68 X1.9
SWCLK_PCU
  Top 0.2: X4.6 56.72,122.68 X1.13
SWCLK_SCU
  Top 0.2: X4.4 56.72,120.68 X1.11
SWD
  Top 0.2: DEBUG.1 102,6.9 102,10.75 PX4_FLOW.10
SWD_ICU
  Top 0.2: X1.2 54.68,106.18 X3.4
SWDIO_0  (via drill 0.5)
  Top 0.2: v9,41 v9,37.1 | v45.1,2.9 47.8,5.6 54.3,5.6 55.5,4.4 57.75,4.4 DEBUG_TO_OUT.2
  Bottom 0.2: U$1.SWDIO 20,44.3 11.3,44.3 9,42 v9,41 | v9,37.1 3.6,31.7 3.6,5.3 6.1,2.8 45,2.8 v45.1,2.9
SWDIO_2
  Top 0.2: DEBUG_TO_OUT.3 62.38,5.6 64.48,3.5 80.77,3.5 83.74,6.47 83.74,15.71 81.73,17.72 DEBUG_FROM_SCU.4
SWDIO_3
  Top 0.2: DEBUG_TO_OUT.5 67.65,4.4 80.4,4.4 82.84,6.84 82.84,12.54 DEBUG_FROM_SCU.2
SWDIO_CCU  (via drill 0.5)
  Top 0.2: X1.10 53.18,120.14 53.18,123.26 55.02,125.1 v66,125.1 | X4.1 84.68,117.6 v74.6,117.6
  Bottom 0.2: v74.6,117.6 67.1,125.1 v66,125.1
SWDIO_PCU  (via drill 0.5)
  Top 0.2: X1.14 56.24,124.2 63.43,124.2 v63.83,123.8 | X4.5 85.76,122.17 87.26,120.67 87.26,118.06 84.3,115.1 v74.6,115.1
  Bottom 0.2: v74.6,115.1 72.53,115.1 v63.83,123.8
SWDIO_SCU  (via drill 0.5)
  Top 0.2: X1.12 53.63,121.69 53.63,123.08 55.2,124.65 64.68,124.65 v65.08,124.25 | X4.3 85.76,120.17 86.81,119.11 86.81,118.25 84.92,116.35 v74.6,116.35
  Bottom 0.2: v74.6,116.35 66.7,124.25 v65.08,124.25
TX1
  Top 0.2: CAM_UP.3 107,20.75 PX4_FLOW.7
TX2
  Top 0.2: PX4_FLOW.5 103.36,29.61 107.14,29.61 CAM_DOWN.3
TX_GPS
  Top 0.2: X3.7 58.7,104.67 59.75,105.72 59.75,111.57 X1.5

## Text on the board
tPlace: SWD_PCU | SWC_PCU | KEY_MIN | KEY_PL | SCU | SWC_SCU | CCU | SWC_CCU | GND | PD7 | RX_GPS | TX_GPS | DF_S_RX | DF_S_TX | SWD_ICU | SWC_ICU | GND | 5V | GND | 150 | 22nF | 10nF | CANL | CANH | CRX | CTX | GND | ADC | 3V3 | GND | 5V | CRX | Rx2 | Tx2 | 5V | GND | CTX | TX2 | RX2 | TX1 | Rx1 | Tx1 | 5V | GND | RX1 | SWC | SWD | 5V | CANH | SWC | Спутникостроительный завод / 2018-2019 | CANL | Спутникостроительный завод / 2018-2019 | SWD | GND
bPlace: SWD_PCU | SWC_PCU | SWC_SCU | SWD_SCU | 5V | 3V3 | SWC_CCU | SWC_CCU | KEY_PL | GND | GND | GND | GND | KEY_MIN | SWC_ICU | MAG_CS | ADC_2 | SDA | GND | DF_S_RX | SWD_ICU | DF_S_TX | GND | DQ | 3V3 | ADC_1 | ADC_2 | DQ | ADC_1 | SCL | 5V | RX_GPS | GND | PD7 | TX_GPS